# Altium PCB MotorControlBoard_A4988.PcbDoc
Units mm, origin at the board's own origin, x right, y up, seen from the top; angles counter-clockwise.
Board outline 44 x 44 mm, 2 copper layers (Top Layer, Bottom Layer), stack 1.571 mm thick; 29 components, 30 nets, 158 pads, 41 vias.
Unrouted connection lines stored in the file: 12.
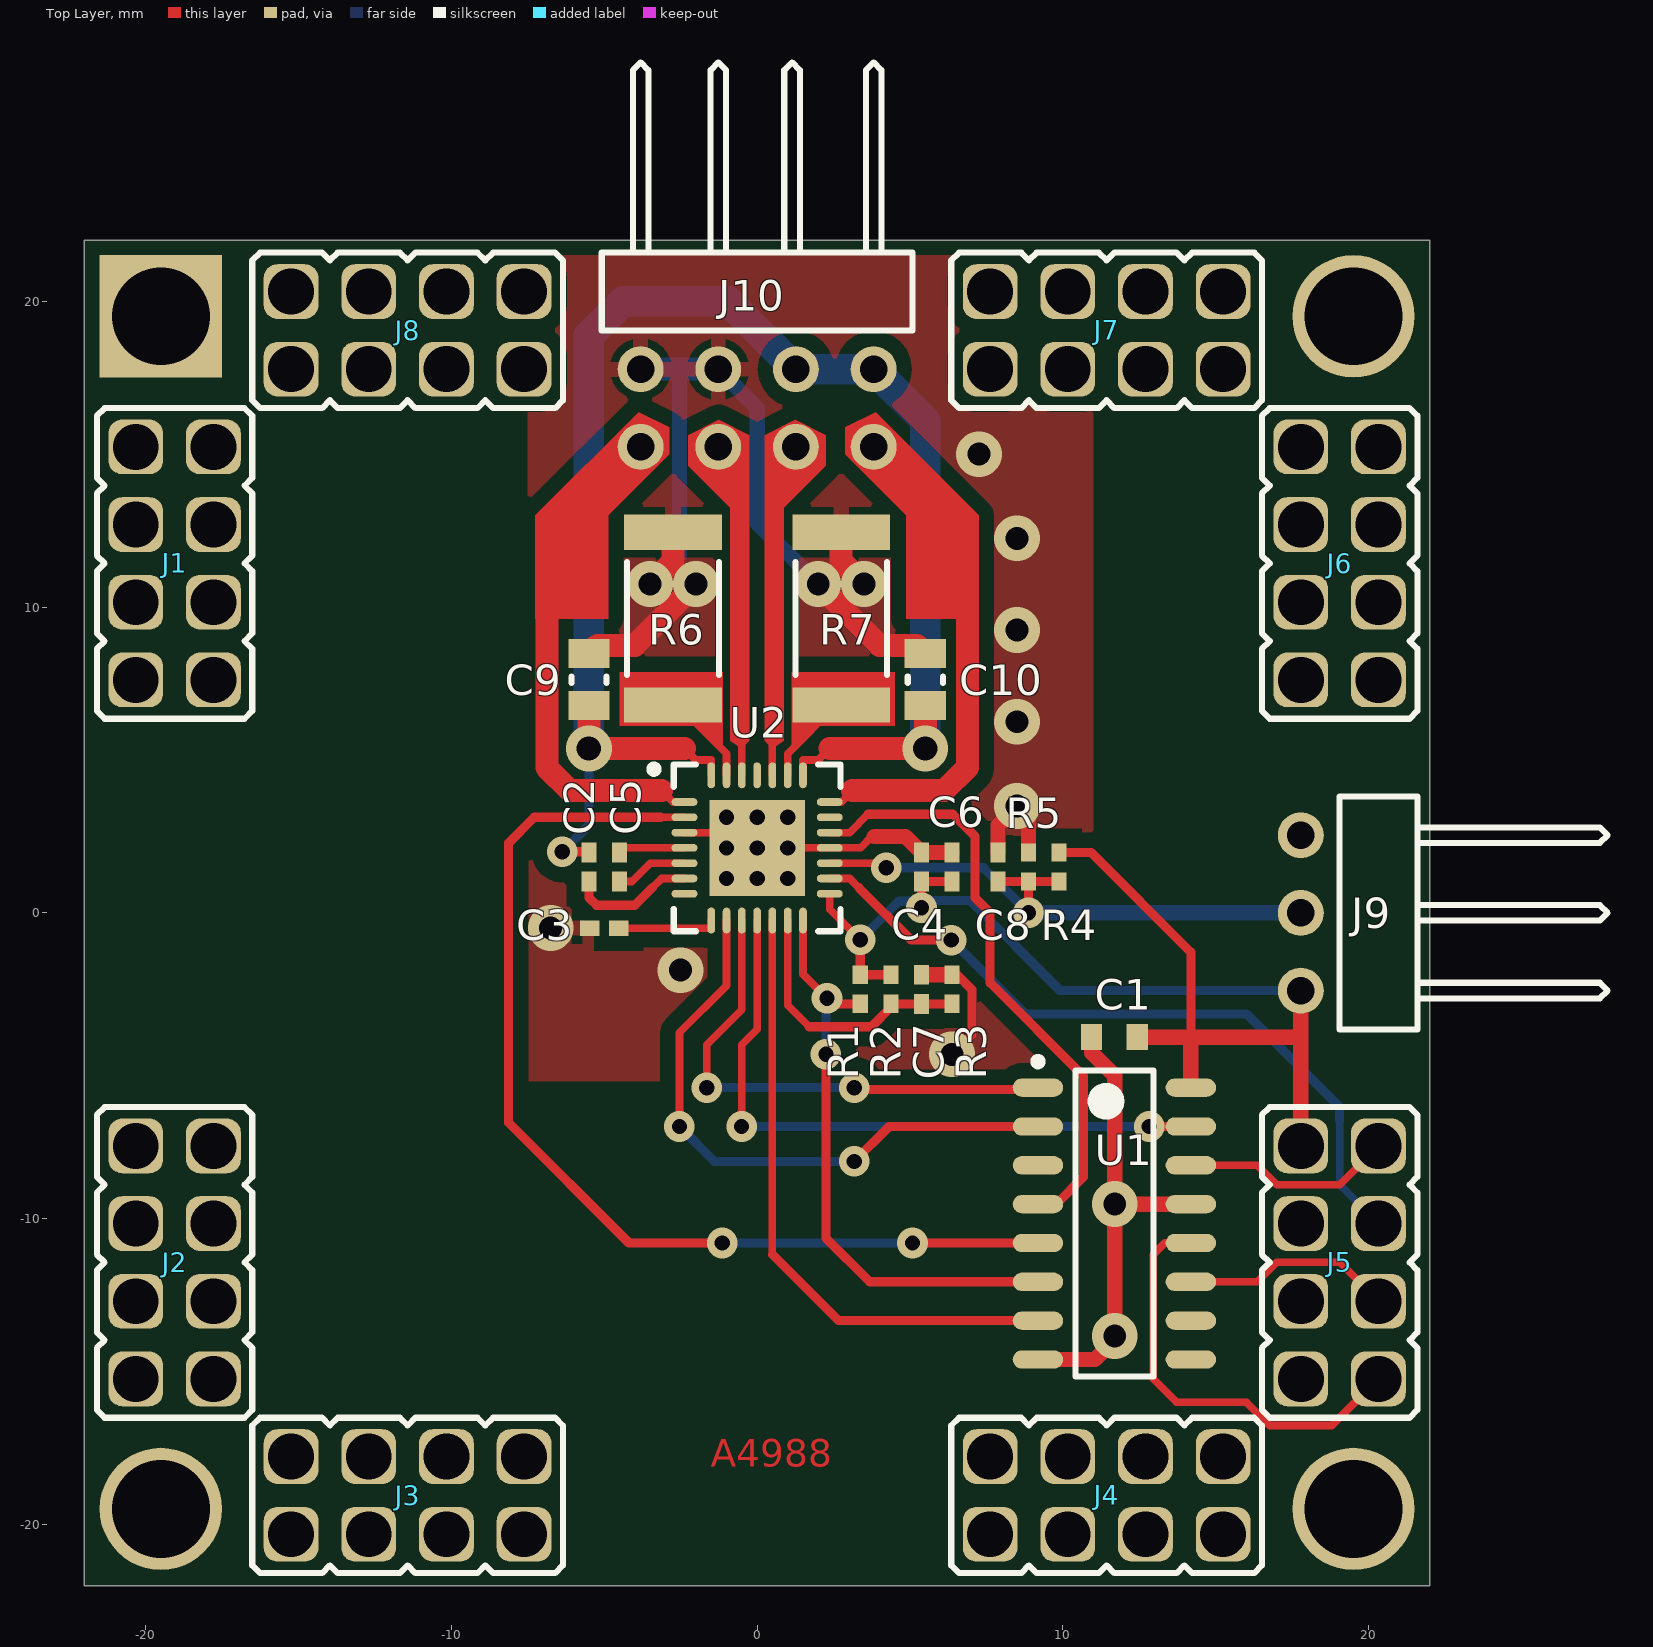
[diagram p0: Top Layer view]
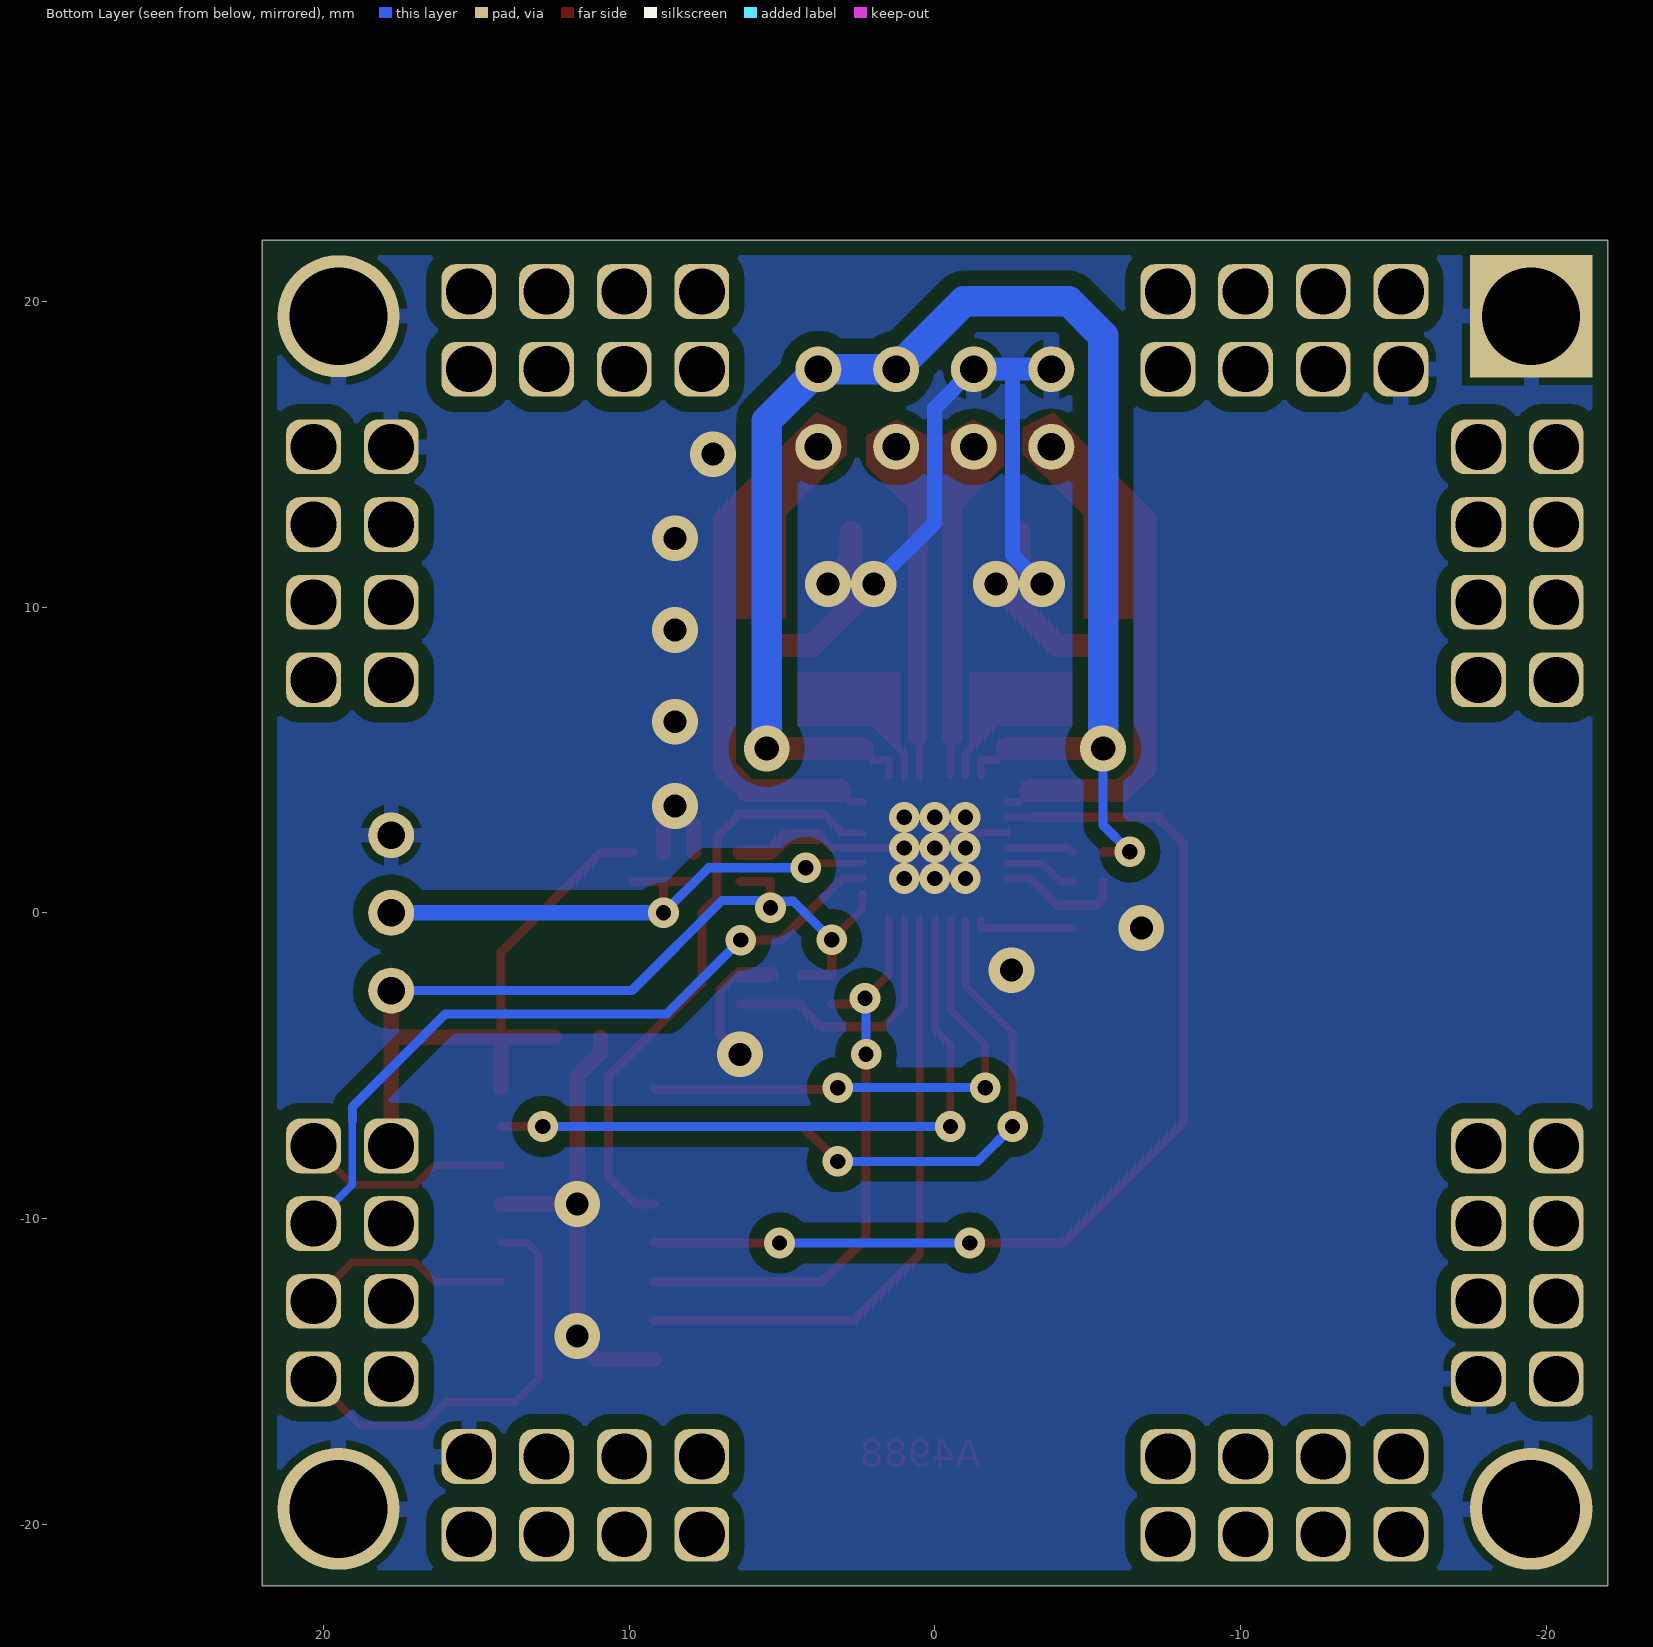
[diagram p1: Bottom Layer view, seen from below]

## Layer stack, top to bottom
Top Solder: solder mask 0.0102, Solder Resist, Dk 3.5
Top Layer: signal copper 0.0356
Dielectric 1: dielectric 1.5, FR-4, Dk 4.8
Bottom Layer: signal copper 0.0356
Bottom Solder: solder mask 0.0102, Solder Resist, Dk 3.5

## Board outline
-22,-22 -22,22 22,22 22,-22

## Design rules (kind name [scope] priority, off if disabled: settings)
Clearance Clearance_Text_Polygon(GND) [InPolygon and InNet('GND') vs IsText] p1: gap=0
Clearance Clearance_Track(GND)_Polygon(GND) [InPolygon and InNet('GND') vs IsTrack and InNet('GND')] p2: gap=0
Clearance Clearance_All_Polygon(GND) [InPolygon and InNet('GND')] p3: gap=0.5
Clearance [All] p4: gap=0.25
HoleSize [All] p1: absolutevalues=TRUE maxlimit=4 minlimit=0.3 maxpercent=80.000 minpercent=20.000
PolygonConnect PolygonConnect_Via(GND) [InNet('GND') vs IsVia] p1: connectstyle=Direct reliefconductorwidth=0.254 reliefentries=4 polygonreliefangle="90 Angle" airgapwidth=0.254
PolygonConnect [All] p2: connectstyle=Relief reliefconductorwidth=0.5 reliefentries=4 polygonreliefangle="90 Angle" airgapwidth=0.254
RoutingVias [All] p1: holewidth=0.5 width=1 viastyle="Through Hole" minholewidth=0.5 minwidth=1 maxholewidth=1.5 maxwidth=2
ShortCircuit ShortCircuit_Text_Polygon(GND) [IsText vs InPolygon and InNet('GND')] p1: allowed=TRUE
ShortCircuit [All] p2: allowed=FALSE
SolderMaskExpansion [All] p1: expansion=0.102
Width [All] p1: maxlimit=2 minlimit=0.25 preferedwidth=0.3
27 further rules are at their usual default settings.

## Components (designator, comment, footprint, x,y, rotation, side; value= is the part's Value field where it differs from the comment)
C1 "0.1/25" CAP0603 11.684,-4.064 r0 top
C2 "0.1/25" CAP0402 -5.5,1.5 r90 top
C3 "1.0/25" CAP0402 -5,-0.5 r0 top
C4 "1.0/25" CAP0402 5.375,1.5 r270 top
C5 "0.1/25" CAP0402 -4.5,1.5 r90 top
C6 "0.1/25" CAP0402 6.375,1.5 r270 top
C7 "0.1/25" CAP0402 5.375,-2.5 r270 top
C8 "0.1/25" CAP0402 7.875,1.5 r270 top
C9 "0.1/50" CAP0805 -5.5,7.625 r270 top
C10 "0.1/50" CAP0805 5.5,7.625 r270 top
J1 "LEFT" PBDM-8 -19.05,11.43 r270 top
J2 "LEFT" PBDM-8 -19.05,-11.43 r270 top
J3 "BOTTOM" PBDM-8 -11.43,-19.05 r0 top
J4 "BOTTOM" PBDM-8 11.43,-19.05 r0 top
J5 "RIGHT" PBDM-8 19.05,-11.43 r90 top
J6 "RIGHT" PBDM-8 19.05,11.43 r90 top
J7 "TOP" PBDM-8 11.43,19.05 r180 top
J8 "TOP" PBDM-8 -11.43,19.05 r180 top
J9 "PLS-3R" PLS-3R 17.78,0 r90 top
J10 "PLD-8R" PLD-8R 0,16.51 r180 top
R1 "5.6k" RES0402 3.375,-2.5 r270 top
R2 "0" RES0402 4.375,-2.5 r270 top
R3 "NC" RES0402 6.375,-2.5 r90 top
R4 "NC" RES0402 9.875,1.5 r270 top
R5 "NC" RES0402 8.875,1.5 r90 top
R6 "0.22" RES2512 -2.75,9.625 r270 top
R7 "0.22" RES2512 2.75,9.625 r270 top
U1 "74HC595D" SO16 11.684,-10.16 r0 top
U2 "A4988" QFN28-0.5 0,2.125 r0 top

## Footprints (in the part's own frame and the unit in brackets; to place one, negate y for a bottom-side part, rotate by r counter-clockwise, add the part's x,y. Pads: shape width x height; smd on the part's side, far side on the other; paste and mask are expansions set on the pad)
CAP0402 [mm]
  rect 0.65x0.5 smd: 1(-0.475,0) 2(0.475,0)
  body extent -0.55,-0.3 0.55,0.3, height 0.5
CAP0603 [mm]
  rect 0.7x0.85 smd: 1(-0.75,0) 2(0.75,0)
  body extent -0.8,-0.4 0.8,0.4, height 0.3
CAP0805 [mm]
  rect 0.95x1.35 smd: 1(-0.85,0) 2(0.85,0)
  silkscreen extent -0.1,-0.58 0.1,0.58, body extent -1,-0.62 1,0.63, height 0.78
PBDM-8 [mm] "5-pin interboard connector, pitch 2.54 mm"
  rrect50% 1.79x1.79 hole 1.5: 1(-3.81,-1.27) 2(-3.81,1.27) 3(-1.27,-1.27) 4(-1.27,1.27) 5(1.27,-1.27) 6(1.27,1.27) 7(3.81,-1.27) 8(3.81,1.27)
  silkscreen extent -5.08,-2.54 5.08,2.54, body extent -5.08,-2.54 5.08,2.54, height 3
PLD-8R [mm] "10-pin dual row (2x5) angle interboard connector, pitch 2.54 mm"
  round 1.5 hole 0.9: 1(-3.81,-1.27) 2(-3.81,1.27) 3(-1.27,-1.27) 4(-1.27,1.27) 5(1.27,-1.27) 6(1.27,1.27) 7(3.81,-1.27) 8(3.81,1.27)
  silkscreen extent -5.08,-11.3 5.08,-2.54, body extent -5.08,-11.3 5.08,1.54, height 5.08
PLS-3R [mm] "3-pin angle interboard connector, pitch 2.54 mm"
  round 1.5 hole 0.9: 1(-2.54,0) 2(0,0) 3(2.54,0)
  silkscreen extent -3.81,-10.03 3.81,-1.27, body extent -3.81,-9.91 3.81,0.31, height 2.44
QFN28-0.5 [mm]
  oval 0.85x0.25 smd: 1(-2.375,1.5) 2(-2.375,1) 3(-2.375,0.5) 4(-2.375,0) 5(-2.375,-0.5) 6(-2.375,-1) 7(-2.375,-1.5) 15(2.375,-1.5) 16(2.375,-1) 17(2.375,-0.5) 18(2.375,0) 19(2.375,0.5) 20(2.375,1) 21(2.375,1.5)
  oval 0.25x0.85 smd: 8(-1.5,-2.375) 9(-1,-2.375) 10(-0.5,-2.375) 11(0,-2.375) 12(0.5,-2.375) 13(1,-2.375) 14(1.5,-2.375) 22(1.5,2.375) 23(1,2.375) 24(0.5,2.375) 25(0,2.375) 26(-0.5,2.375) 27(-1,2.375) 28(-1.5,2.375)
  rect 3.13x3.13 smd: 29(0,0)
  silkscreen extent -3.5,-2.73 2.73,2.72, body extent -2.57,-2.58 2.58,2.57, height 1
RES0402 [mm]
  rect 0.6x0.5 smd: 1(-0.475,0) 2(0.475,0)
  body extent -0.53,-0.28 0.53,0.28, height 0.35
RES2512 [mm]
  rect 1.15x3.2 smd: 1(-2.825,0) 2(2.825,0)
  silkscreen extent -1.85,-1.5 1.85,1.5, body extent -3.22,-1.63 3.22,1.63, height 0.65
SO16 [mm]
  oval 1.65x0.6 smd: 1(-2.5,4.445) 2(-2.5,3.175) 3(-2.5,1.905) 4(-2.5,0.635) 5(-2.5,-0.635) 6(-2.5,-1.905) 7(-2.5,-3.175) 8(-2.5,-4.445) 9(2.5,-4.445) 10(2.5,-3.175) 11(2.5,-1.905) 12(2.5,-0.635) 13(2.5,0.635) 14(2.5,1.905) 15(2.5,3.175) 16(2.5,4.445)
  silkscreen extent -2.62,-5 1.27,5.42, body extent -2,-5 2,5, height 1.75

## Part data
C1: library part CAP0603, "Ceramic chip capacitor 0603"
C2 C3 C4 C5 C6 C7 C8: library part CAP0402, "Ceramic chip capacitor 0402"
C9 C10: library part CAP0805, "Ceramic chip capacitor 0805"
J1 J2 J3 J4 J5 J6 J7 J8: library part PBDM-8, "2x4-pin header, pitch 2.54 mm"
J9: "3-pin angle header, pitch 2.54 mm"
J10: "2x4-pin angle header, pitch 2.54 mm"
R1 R2 R3 R4 R5: library part RES0402, "Ceramic chip resistor"
R6 R7: library part RES2512, "Ceramic chip resistor"
U1: "8-bit serial-in, serial or parallel-out shift register with output latches; 3-state"
U2: "DMOS Microstepping Driver with Translator And Overcurrent Protection"

## Free pads (board coordinates)
  round 4 hole 3.2: 0(-19.5,-19.491) 0(19.5,-19.491) 0(19.5,19.509)
  rect 4x4 hole 3.2: 0(-19.5,19.509)

## Via types
v1: diameter 1, hole 0.5, Top Layer to Bottom Layer, 25 vias
v2: diameter 1.5, hole 0.75, Top Layer to Bottom Layer, 14 vias
v3: diameter 1.5, hole 0.8, Top Layer to Bottom Layer, 2 vias

## Nets (pads, with @x,y where several pads share a name; then routed paths per layer and width w, separated by ;. In a path a pad name is that pad's centre, name@x,y a point inside that pad or via, vN(x,y) a via of type N, cw(c..) or ccw(c..) an arc to the next point about the centre after c; other vN are vias at no path point)
+5V: J1.6 J3.6 J5.6 J7.6
+12V: J1.2 J3.2 J5.2 J7.2
+35V: C2.2 C9.2 C10.2 J10.1 J10.3 U2.22 U2.28 | length 54
  Top Layer w0.25: -2.375,5.375 -2,5 -1.5,5 U2.28 ; U2.22 1.5,5 2,5 2.375,5.375
  Top Layer w0.3: v1(-6.375,2) -5.525,2 C2.2
  Top Layer w0.75: C9.2 v3(-5.5,5.375) -2.375,5.375 ; 2.375,5.375 v3(5.5,5.375) C10.2
  Bottom Layer w0.3: v1(-6.375,2) -5.5,2.875 v3(-5.5,5.375)
  Bottom Layer w1: v3(-5.5,5.375) -5.5,18.875 -4.375,20 -0.95,20 J10.3 J10.1 5.5,16.09 v3(5.5,5.375)
+VCC: U1.10
CLK: J5.3 U1.11 | length 6.9
  Top Layer w0.25: U1.11 16.357,-12.065 16.992,-11.43 19.05,-11.43 J5.3
DATA: J5.7 U1.14 | length 6.9
  Top Layer w0.25: U1.14 16.357,-8.255 16.992,-8.89 19.05,-8.89 J5.7
DIR: U1.4 U2.19 | length 19.8
  Top Layer w0.25: U2.19 3.025,2.625 3.625,3.225
  Top Layer w0.3: 3.625,3.225 6.4,3.225 7.125,2.5 7.125,0.5 7.62,0.005 7.62,-2.286 10.668,-5.334 10.668,-8.636 9.779,-9.525 U1.4
E\N\A\: U1.5 U2.2 | length 34.2
  Top Layer w0.25: -3.15,3.125 U2.2
  Top Layer w0.3: -3.15,3.125 -7.289,3.125 -8.128,2.286 -8.128,-6.858 -4.191,-10.795 v1(-1.143,-10.795) ; v1(5.08,-10.795) U1.5
  Bottom Layer w0.3: v1(-1.143,-10.795) v1(5.08,-10.795)
GND: C1.1 C3.1 C4.1 C6.1 C7.1 C8.1 C9.1 C10.1 J2.8 J4.8 J6.8 J8.8 J9.3 J10.5 J10.7 pad.0 R3.2 R5.2 R6.1 R7.1 U1.8 U1.13 U2.3 U2.18 U2.29 | length 62.8
  Top Layer w0.25: U2.3 -0.5,2.625 v1(0,2.125) ; v1(1,2.125) U2.18 3.383,2.125 3.758,2.5 3.831,2.5
  Top Layer w0.3: v2(6.375,-4.625) 7.025,-3.975 7.025,-2.509 6.541,-2.025 R3.2
  Top Layer w0.5: 3.831,2.5 4.85,2.5 C4.1 C6.1 ; C7.1 R3.2 ; C8.1 7.875,2.875 v2(8.5,3.5) 8.875,3.125 R5.2 ; U1.8 11.049,-14.605 11.696,-13.958 v2(11.696,-9.525) ; C1.1 10.934,-4.572 11.696,-5.334 v2(11.696,-9.525) ; U1.13 v2(11.696,-9.525)
  Top Layer w0.75: C9.1 -5.225,8.75 -4,8.75 v2(-2,10.75) ; v2(-3.5,10.75) -2.75,11.5 R6.1 ; v2(2,10.75) 4,8.75 5.225,8.75 C10.1 ; R7.1 2.75,11.5 v2(3.5,10.75)
  Bottom Layer w0.5: v2(-3.5,10.75) -2.54,11.71 -2.54,17.78 ; J10.5 0,16.51 0,12.75 v2(2,10.75)
  Bottom Layer w0.75: J10.7 -2.54,17.78 J10.5
  other v1: -1,1.125 0,1.125 1,1.125 -1,2.125 -1,3.125 0,3.125 1,3.125
  other v2: 11.696,-13.843 -2.5,-1.875 -6.75,-0.5 8.5,6.25 8.5,9.25 8.5,12.25 7.25,15
LATCH: J5.1 U1.12 | length 14.1
  Top Layer w0.25: U1.12 13.335,-10.795 12.954,-11.176 12.954,-15.24 13.716,-16.002 16.002,-16.002 16.764,-16.764 18.796,-16.764 J5.1
MS1: U1.2 U2.9 | length 20
  Top Layer w0.25: v1(-2.54,-6.985) -2.54,-3.915 -1,-2.375 U2.9
  Top Layer w0.3: v1(3.175,-8.128) 4.318,-6.985 U1.2
  Bottom Layer w0.3: v1(-2.54,-6.985) -1.397,-8.128 v1(3.175,-8.128)
MS2: U1.1 U2.10 | length 16.8
  Top Layer w0.25: v1(-1.651,-5.715) -1.651,-4.318 -0.5,-3.167 U2.10
  Top Layer w0.3: v1(3.175,-5.715) 3.235,-5.775 9.124,-5.775 U1.1
  Bottom Layer w0.3: v1(-1.651,-5.715) v1(3.175,-5.715)
MS3: U1.15 U2.11 | length 21.6
  Top Layer w0.25: v1(-0.508,-6.985) -0.508,-4.318 0,-3.81 U2.11
  Top Layer w0.3: v1(12.827,-6.985) U1.15
  Bottom Layer w0.3: v1(-0.508,-6.985) v1(12.827,-6.985)
NetC2_1: C2.1 U2.6 | length 4.1
  Top Layer w0.25: -3.425,0.825 -3.125,1.125 U2.6
  Top Layer w0.3: C2.1 -5.5,0.5 -5.25,0.25 -4,0.25 -3.425,0.825
NetC3_2: C3.2 U2.8 | length 3.3
  Top Layer w0.25: C3.2 -1.5,-0.5 U2.8
NetC5_1: C5.1 U2.5 | length 2.4
  Top Layer w0.25: C5.1 -4.1,1.025 -3.5,1.625 U2.5
NetC5_2: C5.2 U2.4 | length 2.2
  Top Layer w0.25: C5.2 -4.35,2.125 U2.4
NetC7_2: C7.2 R2.2 R3.1 U2.13 | length 8.8
  Top Layer w0.25: U2.13 1,-3.023 1.702,-3.725
  Top Layer w0.3: 1.702,-3.725 3.741,-3.725 4.375,-3.091 R2.2 C7.2 R3.1
NetC8_2: C8.2 J9.2 R4.2 R5.1 U2.17 | length 19.1
  Top Layer w0.25: U2.17 4.075,1.625 v1(4.225,1.475)
  Top Layer w0.3: C8.2 R5.1 ; v1(8.875,0) R5.1 ; R4.2 R5.1
  Bottom Layer w0.3: v1(4.225,1.475) 7.4,1.475 v1(8.875,0)
  Bottom Layer w0.5: v1(8.875,0) J9.2
NetR6_2: R6.2 U2.27 | length 3.1
  Top Layer w0.25: R6.2 -2.593,6.8 -1,5.207 U2.27
NetR7_2: R7.2 U2.23 | length 3.1
  Top Layer w0.25: U2.23 1,5.207 2.593,6.8 R7.2
OUT1A: J10.4 U2.24 | length 11.1
  Top Layer w0.25: U2.24 0.5,14.47 J10.4
OUT1B: J10.2 U2.21 | length 16.7
  Top Layer w0.25: U2.21 2.75,3.625 3.125,4
  Top Layer w0.75: 3.125,4 6.125,4 6.875,4.75 6.875,12.175 J10.2
OUT2A: J10.6 U2.26 | length 11.1
  Top Layer w0.25: J10.6 -0.5,14.47 U2.26
OUT2B: J10.8 U2.1 | length 16.7
  Top Layer w0.25: -3.125,4 -2.75,3.625 U2.1
  Top Layer w0.75: J10.8 -6.875,12.175 -6.875,4.75 -6.125,4 -3.125,4
R\S\T\: U1.7 U2.12 | length 20.5
  Top Layer w0.25: 0.5,-11.168 U2.12
  Top Layer w0.3: 0.5,-11.168 2.667,-13.335 U1.7
S\L\E\E\P\: R1.2 U1.6 U2.14 | length 19.4
  Top Layer w0.25: U2.14 1.5,-2.008 v1(2.286,-2.794)
  Top Layer w0.3: v1(2.25,-4.625) 2.25,-10.632 3.683,-12.065 U1.6 ; v1(2.286,-2.794) 2.467,-2.975 R1.2
  Bottom Layer w0.3: v1(2.25,-4.625) 2.25,-2.83 v1(2.286,-2.794)
STEP: J5.5 U2.16 | length 24.1
  Top Layer w0.25: U2.16 3.028,1.125 3.328,0.825
  Top Layer w0.3: 3.328,0.825 5.042,-0.889 v1(6.35,-0.889)
  Bottom Layer w0.25: 19.05,-6.796 19.05,-8.89 J5.5
  Bottom Layer w0.3: v1(6.35,-0.889) 8.763,-3.302 16.002,-3.302 19.05,-6.35 19.05,-6.796
VBAT: J1.4 J3.4 J5.4 J7.4
VCC: C1.2 C4.2 C6.2 J1.8 J3.8 J5.8 J7.8 J9.1 R1.1 R2.1 R4.1 U1.16 U2.15 | length 42.8
  Top Layer w0.25: U2.15 2.375,0.125 v1(3.375,-0.875)
  Top Layer w0.3: v1(3.375,-0.875) R1.1 R2.1 ; v1(5.375,0.168) C4.2 C6.2 ; R4.1 10.922,1.975 14.184,-1.287 14.184,-4.064 14.184,-4.104
  Top Layer w0.5: C1.2 14.184,-4.064 17.78,-4.064 ; U1.16 14.184,-4.104 ; J5.8 17.78,-4.064 ; J9.1 17.78,-4.064
  Bottom Layer w0.3: v1(3.375,-0.875) 4.631,0.381 5.162,0.381 v1(5.375,0.168) 5.607,0.4 6.966,0.4 9.906,-2.54 J9.1
pads on no net: J1.1 J1.3 J1.5 J1.7 J2.1 J2.2 J2.3 J2.4 J2.5 J2.6 J2.7 J3.1 J3.3 J3.5 J3.7 J4.1 J4.2 J4.3 J4.4 J4.5 J4.6 J4.7 J6.1 J6.2 J6.3 J6.4 J6.5 J6.6 J6.7 J7.1 J7.3 J7.5 J7.7 J8.1 J8.2 J8.3 J8.4 J8.5 J8.6 J8.7 U1.3 U1.9 U2.7 U2.20 U2.25

## Polygon pours and split planes (outlines as drawn)
GND on Top Layer "Top-GND" (solid, remove dead copper, pour order 2): 11,-5.5 11,21.5 -7.5,21.5 -7.5,-5.5
GND on Bottom Layer "Bottom-GND" (solid, remove dead copper, pour order 4): -21.5,-21.5 21.5,-21.5 21.5,21.5 -21.5,21.5

## Other copper
Top Layer:
  region net OUT1A: 0.875,5.625 0.5,5.375 0.25,5.625 0.25,15.625 1.25,16.125 2.25,15.625 2.25,14.625 0.875,13.25
  region net OUT1B: 4.875,9.625 7.25,9.625 7.25,13 3.875,16.375 2.875,15.875 2.875,15 4.875,13
  region net OUT2B: -4.875,9.625 -7.25,9.625 -7.25,13 -3.875,16.375 -2.875,15.875 -2.875,15 -4.875,13
  region net OUT2A: -0.875,5.625 -0.5,5.375 -0.25,5.625 -0.25,15.625 -1.25,16.125 -2.25,15.625 -2.25,14.625 -0.875,13.25
  region net NetR6_2: -4.5,7.875 -1.125,7.875 -1.125,5.375 -1.875,6.125 -4.5,6.125
  region net NetR7_2: 4.5,7.875 1.125,7.875 1.125,5.375 1.875,6.125 4.5,6.125
  text "A4988" at -1.524,-18.415 h1.52

## Silkscreen, mask and mechanical layers (free items; w line width, h text height)
Board:
  the board outline again, w0.2